# Altium PCB Pallette v2.PcbDoc
Units mm, origin at the board's own origin, x right, y up, seen from the top; angles counter-clockwise.
Board outline 181.32 x 16 mm, 2 copper layers (Top Layer, Bottom Layer); 88 components, 30 nets, 382 pads, 246 vias.
Unrouted connection lines stored in the file: 51.
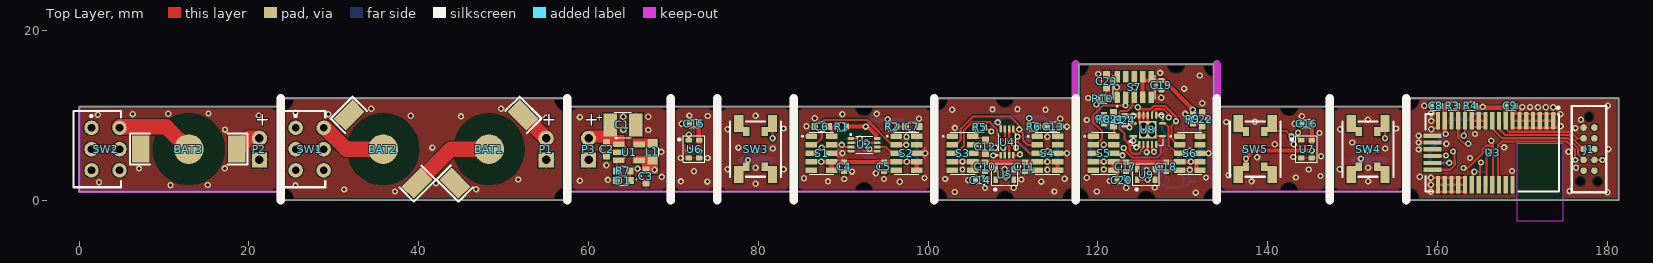
[diagram p0: Top Layer view]
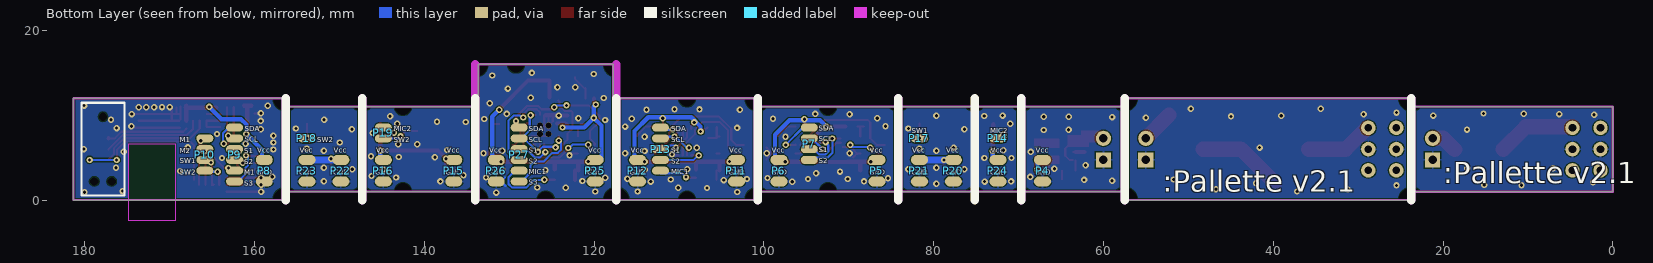
[diagram p1: Bottom Layer view, seen from below]

## Layer stack, top to bottom
Top Solder: solder mask 0.0102, Solder Resist, Dk 3.5
Top Layer: signal copper 0.0356
Dielectric 1: dielectric 0.32, FR-4, Dk 4.8
Bottom Layer: signal copper 0.0356
Bottom Solder: solder mask 0.0102, Solder Resist, Dk 3.5

## Board outline
23.725,0 57.5,0 57.5,1 100.725,1 100.725,0 134.025,0 134.025,1 156.325,1 156.325,0 181.325,0 181.325,12 156.325,12 156.325,11 133.65,11 133.65,16 117.758,16 117.758,12 100.725,12 100.725,11 57.5,11 57.5,12 23.725,12 23.725,11 0,11 0,0.975 23.725,0.975

## Design rules (kind name [scope] priority, off if disabled: settings)
Clearance Clearance_BAT [HasFootprintPad('BAT RETAINER 13', '2')] p1: gap=2.5
Clearance [All] p2: gap=0.125
ComponentClearance [All] p1: gap=0.1 collisioncheckmode=3 verticalgap=0.1 showdistances=FALSE
MinimumSolderMaskSliver [All] p1: minsoldermaskwidth=0.125
PolygonConnect PolygonConnect_Vias [IsVia] p1: connectstyle=Direct reliefconductorwidth=0.254 reliefentries=4 polygonreliefangle="90 Angle" airgapwidth=0.254
PolygonConnect PolygonConnect_BAT [HasFootprint('BAT RETAINER')] p2: connectstyle=Relief reliefconductorwidth=1.8 reliefentries=4 polygonreliefangle="90 Angle" airgapwidth=2.5
PolygonConnect [All] p3: connectstyle=Relief reliefconductorwidth=0.254 reliefentries=4 polygonreliefangle="90 Angle" airgapwidth=0.127
RoutingVias [All] p1: holewidth=0.127 width=0.4 viastyle="Through Hole" minholewidth=0.102 minwidth=0.381 maxholewidth=0.711 maxwidth=1.27
SolderMaskExpansion [All] p1: expansion=0.102
Width [All] p1: maxlimit=2.54 minlimit=0.1 preferedwidth=0.254
28 further rules are at their usual default settings.

## Components (designator, comment, footprint, x,y, rotation, side; value= is the part's Value field where it differs from the comment)
BAT1 "BAT RETAINER 13" "BAT RETAINER 13" 48.275,6 r45 top
BAT2 "BAT RETAINER 13" "BAT RETAINER 13" 35.8,6 r315 top
BAT3 "BAT RETAINER 13" "BAT RETAINER 13" 12.9,6 r0 top (schematic designator BAT1)
C1 "100uF" 1411 64.05,8.85 r0 top (schematic designator C2)
C2 "10uF" 0603 62.125,5.975 r90 top (schematic designator C1)
C3 "22uF" 0603 66.75,2.775 r90 top
C4 "100nF" 0402 90.1,3.9 r90 top
C5 "100nF" 0402 94.8,3.9 r90 top
C6 "22uF" 0603 87.45,8.65 r0 top
C7 "22uF" 0603 98.125,8.65 r180 top
C8 "100nF" 0402 159.825,11.1 r0 top (schematic designator C6)
C9 "100nF" 0402 168.6,11.1 r180 top (schematic designator C5)
C10 "100nF" 0402 106.7,3.9 r90 top (schematic designator C6)
C11 "100nF" 0402 111.4,3.9 r90 top (schematic designator C7)
C12 "22uF" 0603 106.75,6.275 r90 top (schematic designator C18)
C13 "22uF" 0603 114.75,8.65 r180 top (schematic designator C19)
C14 "100nF" 0402 106.15,2.35 r0 top
C15 "100nF" 0402 72.425,9 r180 top
C16 "100nF" 0402 144.575,9 r180 top
C17 "100nF" 0402 123.3,3.9 r90 top
C18 "100nF" 0402 128.05,3.9 r90 top (schematic designator C7)
C19 "100nF" 0402 127.475,13.525 r90 top
C20 "100nF" 0402 122.8,2.35 r0 top (schematic designator C14)
C21 "22uF" 0603 121.85,9.5 r270 top
C22 "22uF" 0603 132.3,9.5 r270 top (schematic designator C19)
C23 "22uF" 0603 121.025,14 r270 top
C24 "100nF" 0402 123.15,9.375 r270 top
D1 "LED Indicator" LED 64.1,2.3 r180 top
J1 "HEADER PROG" TC2050-IDC-NL 177.85,6 r270 top
L1 "10uH" 0805 67.525,5.675 r270 top
P1 "HEADER PW TH" "PORT PW TH 2P" 55,6 r0 top
P2 "HEADER PW TH" "PORT PW TH 2P" 21.225,6 r0 top (schematic designator P1)
P3 "HEADER PW TH" "PORT PW TH 2P" 60,6 r0 top
P4 "HEADER PW SMT" "PORT PW SMT 2P" 67.175,3.46 r180 bottom
P5 "HEADER PW SMT" "PORT PW SMT 2P" 86.675,3.46 r180 bottom
P6 "HEADER PW SMT" "PORT PW SMT 2P" 98.225,3.46 r180 bottom
P7 "CONN 4P" "PORT CONN 4P" 94.65,6.635 r180 bottom
P8 "HEADER PW SMT" "PORT PW SMT 2P" 158.85,3.46 r180 bottom
P9 "CONN 6P" "PORT CONN 6P" 162.35,5.365 r180 bottom
P10 "CONN 4P" "PORT CONN 4P" 165.85,5.365 r180 bottom
P11 "HEADER PW SMT" "PORT PW SMT 2P" 103.225,3.46 r180 bottom
P12 "HEADER PW SMT" "PORT PW SMT 2P" 114.875,3.46 r180 bottom (schematic designator P11)
P13 "CONN 5P" "PORT CONN 5P" 112.175,6 r180 bottom
P14 "CONN 1P" "PORT CONN 1P" 72.425,7.27 r0 bottom
P15 "HEADER PW SMT" "PORT PW SMT 2P" 136.525,3.46 r180 bottom
P16 "HEADER PW SMT" "PORT PW SMT 2P" 144.825,3.46 r180 bottom
P17 "CONN 1P" "PORT CONN 1P" 81.675,7.27 r0 bottom
P18 "CONN 1P" "PORT CONN 1P" 153.825,7.27 r0 bottom (schematic designator P17)
P19 "CONN 2P" "PORT CONN 2P" 144.825,7.905 r180 bottom
P20 "HEADER PW SMT" "PORT PW SMT 2P" 77.675,3.46 r180 bottom
P21 "HEADER PW SMT" "PORT PW SMT 2P" 81.675,3.46 r180 bottom
P22 "HEADER PW SMT" "PORT PW SMT 2P" 149.825,3.46 r180 bottom (schematic designator P20)
P23 "HEADER PW SMT" "PORT PW SMT 2P" 153.825,3.46 r180 bottom (schematic designator P21)
P24 "HEADER PW SMT" "PORT PW SMT 2P" 72.425,3.46 r180 bottom
P25 "HEADER PW SMT" "PORT PW SMT 2P" 119.875,3.46 r180 bottom (schematic designator P11)
P26 "HEADER PW SMT" "PORT PW SMT 2P" 131.525,3.46 r180 bottom (schematic designator P11)
P27 "CONN 6P" "PORT CONN 6P" 128.825,5.365 r180 bottom
R1 "30R" 0402 89.8,8.65 r0 top
R2 "30R" 0402 95.775,8.65 r180 top
R3 "4.7K" 0402 161.775,11.1 r180 top
R4 "4.7K" 0402 163.925,11.1 r0 top
R5 "30R" 0402 106.1,8.55 r0 top (schematic designator R1)
R6 "30R" 0402 112.425,8.65 r180 top (schematic designator R2)
R7 "220R" 0603 64.075,3.425 r180 top
R8 "30R" 0402 120.7,9.5 r90 top
R9 "30R" 0402 131.175,9.5 r90 top (schematic designator R2)
R10 "30R" 0402 120.55,11.925 r180 top
S1 "Si1141-M01" SI1141-M01 87.45,5.5 r0 top
S2 "Si1141-M01" SI1141-M01 97.45,5.5 r0 top
S3 "Si1141-M01" SI1141-M01 104.05,5.5 r0 top (schematic designator S1)
S4 "Si1141-M01" SI1141-M01 114.05,5.5 r0 top (schematic designator S2)
S5 "Si1141-M01" SI1141-M01 120.675,5.5 r0 top
S6 "Si1141-M01" SI1141-M01 130.825,5.5 r0 top
S7 "Si1141-M01" SI1141-M01 124.26,13.3 r90 top
SW1 "SW SPDT SMT" "SW SPDT SMT" 27.15,6 r270 top
SW2 "SW SPDT SMT" "SW SPDT SMT" 3.1,6 r270 top
SW3 "SW PB" "SW PB" 79.675,6 r90 top
SW4 "SW PB" "SW PB" 151.825,6 r90 top
SW5 "SW PB" "SW PB" 138.525,6 r90 top
U1 "XC9265A221MR-G" SOT-25 64.775,5.65 r0 top
U2 "74LVC2G125" VSSOP8 92.45,6.5 r270 top
U3 "BLE113" BLE113-A 166.575,5.575 r270 top
U4 "74LVC2G125" VSSOP8 109.3,6.825 r0 top (schematic designator U2)
U5 "MIC SPW0430HR5HB-B" MIC-4P 109.025,3 r90 top
U6 "MIC SPW0430HR5HB-B" MIC-4P 72.425,6 r0 top
U7 "MIC SPW0430HR5HB-B" MIC-4P 144.575,6 r0 top
U8 "SN74LVC125A" VQFN14 125.875,8.275 r0 top
U9 "MIC SPW0430HR5HB-B" MIC-4P 125.675,3 r90 top (schematic designator U5)

## Footprints (in the part's own frame and the unit in brackets; to place one, negate y for a bottom-side part, rotate by r counter-clockwise, add the part's x,y. Pads: shape width x height; smd on the part's side, far side on the other; paste and mask are expansions set on the pad)
0402 [mm] "Body 1.0x0.5mm, IPC High Density"
  rect 0.6x0.7 smd: 1(-0.55,0) 2(0.55,0)
  silkscreen extent -0.5,-0.5 0.5,0.5, body extent -0.55,-0.3 0.55,0.3, height 1.3
0603 [mm] "Body 1.6x0.8mm, IPC High Density"
  rect 0.8x0.8 smd: 1(-0.8,0) 2(0.8,0)
  silkscreen extent -0.4,-0.55 0.4,0.55, body extent -0.81,-0.46 0.81,0.46, height 1.3
0805 [mm] "Body 2.0x1.25mm, IPC High Density"
  rect 1x1.2 smd: 1(-1,0) 2(1,0)
  silkscreen extent -0.5,-0.75 0.5,0.75, body extent -1.02,-0.65 1.02,0.65, height 1.3
1411 [mm] "Body 3.5x2.8mm, IPC High Density"
  rect 1.6x2.7 smd: 1(-1.5,0) 2(1.5,0)
  silkscreen extent -1,-1.5 1,1.5, body extent -1.52,-1.4 1.52,1.4, height 1.3
"BAT RETAINER 13" [mm] "Body 13.36x12.07mm"
  rect 2.03x3.18 smd: 0(-5.665,0) 1(5.665,0)
  round 3.5 smd paste-5 mask+2.5: 2(0,0)
  silkscreen extent -6.93,-1.83 6.93,1.83, body extent -6.68,-3.15 6.68,4.21, height 5.95
BLE113-A [mm] "Body 15.725x9.15mm"
  rrect50% 2.1x0.5 smd: 1(-3.775,7.075)
  rect 2.1x0.5 smd: 2(-3.775,6.275) 3(-3.775,5.475) 4(-3.775,4.675) 5(-3.775,3.875) 6(-3.775,3.075) 7(-3.775,2.275) 8(-3.775,1.475) 9(-3.775,0.675) 10(-3.775,-0.125) 11(-3.775,-0.925) 12(-3.775,-1.725) 13(-3.775,-2.525) 14(-3.775,-3.325) 15(-3.775,-4.125) 16(-3.775,-4.925) 17(-3.775,-5.725) 18(-3.775,-6.525) 25(3.775,-6.525) 26(3.775,-5.725) 27(3.775,-4.925) 28(3.775,-4.125) 29(3.775,-3.325) 30(3.775,-2.525) 31(3.775,-1.725) 32(3.775,-0.925) 33(3.775,-0.125) 34(3.775,0.675) 35(3.775,1.475) 36(3.775,2.275)
  rect 0.5x2.1 smd: 19(-2,-7.175) 20(-1.2,-7.175) 21(-0.4,-7.175) 22(0.4,-7.175) 23(1.2,-7.175) 24(2,-7.175)
  Keep-Out Layer region: -1.075,2.75 8.025,2.75 8.025,8.25 -1.075,8.25
  silkscreen extent -5.43,-7.98 4.57,7.78, body extent -4.57,-7.97 4.57,7.75, height 1.9
LED [mm] "SMT LED; 2 Flat Leads"
  rect 0.8x0.8 smd: 1(-0.825,0) 2(0.825,0)
  silkscreen extent -0.5,-0.55 0.5,0.55, body extent -0.8,-0.4 0.8,0.4, height 0.65
MIC-4P [mm]
  rect 0.79x0.55 smd: 1(-0.625,1.045) 2(-0.625,-1.045) 3(0.625,-1.045) 4(0.625,1.045)
  silkscreen extent -1.87,-1.55 1.25,1.55, body extent -1.25,-1.55 1.25,1.55, height 1.25
"PORT CONN 1P" [mm] "Body 2x0.95mm"
  oval 2x0.95 smd paste-10: 1(0,0)
"PORT CONN 2P" [mm] "Body 1.2x2mm"
  oval 2x0.95 smd paste-10: 1(0,0.635) 2(0,-0.635)
"PORT CONN 4P" [mm] "Body 1.2x2mm"
  oval 2x0.95 smd paste-10: 1(0,1.905) 2(0,0.635) 3(0,-0.635) 4(0,-1.905)
"PORT CONN 5P" [mm] "Body 1.2x2mm"
  oval 2x0.95 smd paste-10: 1(0,2.54) 2(0,1.27) 3(0,0) 4(0,-1.27) 5(0,-2.54)
"PORT CONN 6P" [mm] "Body 1.2x2mm"
  oval 2x0.95 smd paste-10: 1(0,3.175) 2(0,1.905) 3(0,0.635) 4(0,-0.635) 5(0,-1.905) 6(0,-3.175)
"PORT PW SMT 2P" [mm] "Body 1.2x2mm"
  oval 2x1.2 smd paste-10: 1(0,1.27) 2(0,-1.27)
"PORT PW TH 2P" [mm]
  round 1.8 hole 1: 1(0,1.27)
  rect 1.8x1.8 hole 1: 2(0,-1.27)
SI1141-M01 [mm] "Body 4.9x2.85mm"
  rrect50% 1.35x0.65 smd: 1(-1.2,2)
  rect 1.35x0.65 smd: 2(-1.2,1) 3(-1.2,0) 4(-1.2,-1) 5(-1.2,-2) 6(1.2,-2) 7(1.2,-1) 8(1.2,0) 9(1.2,1) 10(1.2,2)
  silkscreen extent -2.27,-2.48 1.43,2.47, body extent -1.43,-2.45 1.43,2.45, height 1.3
SOT-25 [mm] "Body 2.9x2.8mm"
  rrect50% 1.35x0.65 smd: 1(-1.2,0.95)
  rect 1.35x0.65 smd: 2(-1.2,0) 3(-1.2,-0.95) 4(1.2,-0.95) 5(1.2,0.95)
  silkscreen extent -1.52,1.63 -1.48,1.67, body extent -0.8,-1.45 0.8,1.45, height 1.3
"SW PB" [mm] "Switch"
  rect 2x1.1 smd: 1(-3,2) 1(3,2) 2(-3,-2) 2(3,-2)
  rect 1.05x0.75 smd: 1(-2.075,1.085) 1(2.075,1.085) 2(-2.075,-1.085) 2(2.075,-1.085)
  silkscreen extent -3.25,-3 3.25,3, body extent -3.25,-3 3.25,3, height 2.5
"SW SPDT SMT" [mm] "Switch"
  round 1.7 hole 0.9: 1(-2.5,1.65) 1(-2.5,-1.65) 2(0,1.65) 2(0,-1.65) 3(2.5,1.65) 3(2.5,-1.65)
  silkscreen extent -4.5,-3.77 4.5,1.83, body extent -4.5,-3.77 4.5,1.83, height 3.22
TC2050-IDC-NL [mil] "Programming pads"
  round 0 hole 39 unplated: 0(-150,0) 0(150,-40) 0(150,40)
  round 31 smd paste-50: 1(-100,-25) 2(-50,-25) 3(0,-25) 4(50,-25) 5(100,-25) 6(100,25) 7(50,25) 8(0,25) 9(-50,25) 10(-100,25)
  silkscreen extent -200,-80 200,80
VQFN14 [mm] "Body 3.65x3.65mm"
  rect 2.05x2.05 smd: 0(0,0)
  rect 0.85x0.28 smd mask+0.05: 1(-1.725,-0.75)
  oval 0.28x0.85 smd mask+0.05: 2(-1,-1.725) 3(-0.5,-1.725) 4(0,-1.725) 5(0.5,-1.725) 6(1,-1.725) 9(1,1.725) 10(0.5,1.725) 11(0,1.725) 12(-0.5,1.725) 13(-1,1.725)
  oval 0.85x0.28 smd mask+0.05: 7(1.725,-0.75) 8(1.725,0.75) 14(-1.725,0.75)
  silkscreen extent -2.15,-1.83 1.82,1.83, body extent -1.83,-1.82 1.83,1.83, height 1
VSSOP8 [mm] "Body 2.1x2.4mm"
  oval 0.3x0.8 smd mask+0.05: 1(-0.75,-1.55)
  rect 0.3x0.8 smd mask+0.05: 2(-0.25,-1.55) 3(0.25,-1.55) 4(0.75,-1.55) 5(0.75,1.55) 6(0.25,1.55) 7(-0.25,1.55) 8(-0.75,1.55)
  silkscreen extent -1.25,-1.57 1,1, body extent -1,-1.2 1,1.2, height 1

## Part data
BAT1 BAT2 BAT3: "RETAINER COIN CELL SMD 7.9MM"
C1: library part "Cap Pol 100uF", "CAP TANT POLY 100UF 8V 1411"
C2: library part "CAP 10uF", "CAP CER 10UF ±20% 10V X5R 0603"
C3 C21: library part "CAP 22uF", "CAP CER 22UF 6.3V X5R 0603"
C4 C5 C8 C9 C10 C11 C14 C15 C16 C17 C18 C19 C20 C24: library part "Cap 100nF", "CAP CER 0.1UF 10V X5R 0402"
C6 C7 C12 C13 C22 C23: library part "Cap 22uF", "CAP CER 22UF 6.3V X5R 0603"
D1: "LED Red 630nm 2.2V Diffused White Lens 0603"
J1: "PADS PROGRAMMING"
L1: library part "IND 10uH", "FIXED IND 10UH 500MA 320 MOHM"
P1 P2 P3: "PADS POWER"
P4 P5 P6 P8 P11 P12 P15 P16 P20 P21 P22 P23 P24 P25 P26: "Connection Port"
P7 P10: library part "HEADER CONN 4P", "Connection Port"
P9 P27: library part "HEADER CONN 6P", "Connection Port"
P13: library part "HEADER CONN 5P", "Connection Port"
P14 P17 P18: library part "HEADER CONN 1P", "Connection Port"
P19: library part "HEADER CONN 2P", "Connection Port"
R1 R2 R5 R6 R8 R9 R10: library part "Res 30R", "RES SMD 30 OHM 1% 1/16W 0402"
R3 R4: library part "Res 4.7K", "RES SMD 4.7K OHM 1% 1/16W 0402"
R7: library part "RES 220R", "RES SMD 220 OHM 1% 1/10W 0603"
S1 S2 S3 S4 S5 S6 S7: "SENS IR PROXIMITY AMB LT 10QFN"
SW1 SW2: "SW Single-Pole Double-Throw SMT Right-Angle"
SW3 SW4 SW5: "Switch Button"
U1: library part "VR XC9265A221MR-G", "IC REG BUCK 2.2V 0.2A SYNC SOT25"
U2 U4: library part "BUFF 74LVC2G125", "IC BUS BUFF DVR TRI-ST DL 8VSSOP"
U3: library part "uC BLE113", "MODULE BT 4.0 BLE113 OTA"
U5 U6 U7 U9: "MIC MEMS ANALOG OMNI"
U8: library part "BUFF SN74LVC125A", "IC BUS BUFF TRI-ST QD 14VQFN"

## Free pads (board coordinates)
  round 0 hole 3 unplated: 0(23.725,0) 0(23.725,12) 0(57.5,0) 0(57.5,12) 0(69.675,0) 0(69.675,12) 0(75.175,12) 0(75.175,0) 0(84.175,12) 0(84.175,0) 0(100.725,0) 0(100.725,12) 0(117.375,0) 0(117.375,16) 0(134.025,0) 0(134.025,16) 0(147.325,0) 0(147.325,12) 0(156.325,0) 0(156.325,12)
  round 0 hole 2 unplated: 0(92.45,1) 0(92.45,11) 0(109.05,0) 0(109.05,12) 0(125.7,0) 0(129.2,16) 0(142.525,1) 0(142.525,11)

## Via types
v1: diameter 0.75, hole 0.38, Top Layer to Bottom Layer, tented both sides, 242 vias
v2: diameter 0.7, hole 0.7, Top Layer to Bottom Layer, tented bottom, 4 vias

## Nets (pads, with @x,y where several pads share a name; then routed paths per layer and width w, separated by ;. In a path a pad name is that pad's centre, name@x,y a point inside that pad or via, vN(x,y) a via of type N, cw(c..) or ccw(c..) an arc to the next point about the centre after c; other vN are vias at no path point)
+2V2: C3.2 C4.2 C5.2 C8.2 C9.2 C10.2 C11.2 C14.1 C15.1 C16.1 C17.2 C18.2 C19.2 C20.1 C24.2 J1.2 L1.2 P4.1 P5.1 P6.1 P8.1 P11.1 P12.1 P15.1 P16.1 P20.1 P21.1 P22.1 P23.1 P24.1 P25.1 P26.1 R1.2 R2.2 R3.2 R4.2 R5.2 R6.2 R8.2 R9.2 R10.2 S1.4 S1.6 S1.7 S2.4 S2.6 S2.7 S3.4 S3.6 S3.7 S4.4 S4.6 S4.7 S5.4 S5.6 S5.7 S6.4 S6.6 S6.7 S7.4 S7.6 S7.7 SW3.1 SW4.1 SW5.1 U1.4 U2.8 U3.8 U3.17 U4.8 U5.4 U6.4 U7.4 U8.14 U9.4 | length 163
  Top Layer w0.254: SW3.1@78.825,4.125 v1@78.825,4.725 ; C14.1 S3.6@105.6,3.45 ; R5.2 106.875,8.325 v1@107.45,8.325 ; v1(108.2,9.15) 108.55,8.8 U4.8 ; R6.2@111.9,8.65 v1@111.9,9.5 ; SW4.1@150.975,4.125 v1(150.975,4.875) ; U3.8@168.05,8.4 168.402,8.048 175.675,8.048 ; 175.685,8.048 176.463,7.27 J1.2
  Top Layer w0.5: U6.4@72.975,7.045 C15.1@72.975,8.925 ; v1(73.05,5.775) U6.4 ; S1.4 S1.7 ; S1.6 S1.7 ; R1.2@90.375,8.65 v1(92.65,8.65) ; v1@92.85,8.65 93.85,7.65 93.85,7.4 ; C5.2@94.875,4.475 90.125,4.475 90.1,4.5 S1.7 ; C5.2@94.95,4.5 S2.4 S2.7 S2.6 ; R2.2 v1@95.225,9.475 ; S3.4 S3.7@105.225,4.5 ; S3.6@105.225,3.5 S3.7@105.225,4.5 ; C10.2@106.7,4.5 S3.7 S3.7@105.225,4.5 ; C10.2@106.725,4.5 S4.4 S4.7 S4.6 ; U5.4 107.98,4.495 ; S5.4@119.5,4.5 S5.7 S5.6 ; v1@120,11.45 R10.2 ; S5.7@121.9,4.5 C17.2@123.35,4.5 ; C20.1 S5.6@122.25,3.45 ; C24.2 123.35,9.025 U8.14@124.375,9.025 ; C17.2@123.385,4.49 123.375,4.5 127.101,4.5 S6.7@131.9,4.5 ; U9.4 124.63,4.495 ; S7.4 125.26,14.075 C19.2 127.775,14.075 v1@131.15,10.7 ; S6.6@131.6,3.5 S6.7@131.6,4.5 ; SW5.1@137.45,3.935 v1(137.45,4.875) 138.4,5.825 v1(145.2,5.825) ; v1@145.2,5.875 U7.4 C16.1@145.2,8.925 ; C8.2 R3.2 ; v1@160.85,7.875 U3.17@160.85,9.25 ; U3.17 160.85,11.05 ; R4.2@164.475,10.875 C9.2@168.05,10.875 ; U3.8 C9.2@168.05,10.875 ; C9.2 C9.2@168.05,10.875 ; C9.2@168.1,10.875 C9.2@168.05,10.875 ; J1.2@177.18,7.27 J1.2
  Bottom Layer w0.254: P20.1 P20.1@78.005,4.73 ; P22.1 P22.1@150.155,4.73
  Bottom Layer w0.5: v1(67.775,3.575) P4.1@67.775,4.75 ; P24.1@73.05,4.725 v1(73.05,5.775) ; v1(92.65,8.65) 93.4,9.4 96.973,9.4 98.675,7.698 P6.1@98.675,4.325 ; v1@107.45,8.225 107.45,8.65 108.55,9.75 113.625,9.75 115.25,8.125 P12.1@115.25,4.55 ; P25.1@119.125,4.73 119.125,8.77 v1(120.031,9.675) ; v1(119.8,11.25) 120.031,11.019 v1(120.031,9.675) ; v1(123.725,8.55) 121.156,8.55 v1(120.031,9.675) ; v1(131.175,10.65) 132,9.825 P26.1@132,4.7 ; P16.1@145.2,5.105 v1@145.2,5.875 ; P8.1@159.125,4.725 159.125,5.925 v1(160.975,7.775) ; v1@160.95,7.825 160.95,8.892 161.583,9.525 163.875,9.525 v1(165.325,10.975)
  Bottom Layer w0.8: P20.1@78.005,4.73 P21.1 ; P22.1@150.155,4.73 P23.1
  other v1: 87.4,4.5 97.475,4.5 114.05,4.5 130.95,4.5 104.05,4.525 120.675,4.525 78.775,4.725 107.45,8.075 95.225,9.525 111.9,9.625
GND: C1.2 C2.1 C3.1 C4.1 C5.1 C6.1 C7.1 C8.1 C9.1 C10.1 C11.1 C12.1 C13.1 C14.2 C15.2 C16.2 C17.1 C18.1 C19.1 C20.2 C21.1 C22.1 C23.1 C24.1 D1.2 J1.1 P1.2 P2.2 P3.2 P4.2 P5.2 P6.2 P8.2 P11.2 P12.2 P15.2 P16.2 P20.2 P21.2 P22.2 P23.2 P24.2 P25.2 P26.2 S1.8 S2.8 S3.8 S4.8 S5.8 S6.8 S7.8 SW1.2 SW2.2 U1.2 U2.4 U3.1 U3.2 U3.3 U3.4 U3.5 U3.6 U3.7 U3.11 U3.12 U3.13 U3.18 U3.19 U3.20 U3.21 U3.25 U3.26 U3.27 U3.28 U3.29 U3.36 U4.4 U5.2 U5.3 U6.2 U6.3 U7.2 U7.3 U8.0 U8.7 U8.11 U8.12 U8.13 U9.2 U9.3 | length 57.3
  Top Layer w0.254: U1.2 U1.2 ; S1.8 89.006,5.5 89.504,5.002 ; S1.8@88.981,5.45 89.479,5.948 ; S2.8@98.981,5.475 99.666,6.159 ; S2.8@99.006,5.5 99.703,4.803 ; S3.8@105.225,5.5 S3.8@105.581,5.5 ; U4.4 v1@110.675,5.275 ; S5.8 122.65,5.5 v1(122.89,5.26) ; v1(124.15,9.95) v1@124.2,10 ; U8.13@124.875,9.925 124.875,9.275 v2(125.375,8.775) ; U8.0@125.375,8.25 U8.12@125.375,9.975 ; U8.0@125.625,7.525 U8.7@127.35,7.525 ; U8.0 U8.11 ; v1@159.225,8.525 U3.18@160,8.525 ; v1@159.225,10.175 U3.18@160,10.175 ; v1@159.45,0.975 U3.29@163.275,0.975 ; 159.65,2.625 U3.29@163.275,2.625 ; U3.25 U3.26 U3.29 ; U3.13@163.977,10.15 U3.11@165.625,10.15 ; U3.13@164.002,8.625 U3.11@165.65,8.625 ; U3.13 U3.12 U3.11 U3.11@165.65,8.6 ; U3.7@168.725,9.475 168.725,11.021 ; U3.7@168.752,10.15 v1@174.35,10.15 ; U3.7@168.777,8.525 v1@174.25,8.525 ; U3.7 U3.6 U3.5 U3.4 U3.3 U3.2 U3.1 ; 169.2,10.15 C9.1@169.2,10.898 ; U3.6@169.75,9.427 v1@169.75,10.973
  Top Layer w0.45: 62.225,5.648 U1.2@63.3,5.648
  Top Layer w0.5: C24.1@123.175,9.95 v1(124.15,9.95) ; v1@124.2,10 U8.13 U8.12 U8.11@125.75,10 ; 131.175,5.5 S6.8 v1(133.025,5.5)
  Bottom Layer w0.254: 130.429,1.657 P26.2@130.912,2.14 ; 130.479,2.673 P26.2@130.962,2.19 ; P26.2@131.062,2.19 P26.2
  other v1: 131.525,0.875 180.025,0.925 103.125,0.95 159.225,0.975 37.2,1 114.875,1 119.85,1 175.55,1.05 31.2,1.25 46.75,1.275 106.7,1.425 110.075,1.45 123.35,1.45 126.7,1.475 25.475,1.725 10.75,1.75 15.15,1.775 159.225,1.8 79.675,1.925 42.025,1.975 2.325,2.1 96.65,2.15 74,2.175 113.325,2.175 70.875,2.2 88.2,2.2 138.1,2.2 151.825,2.225 121.375,2.25 58.975,2.275 104.725,2.35 62.275,2.375 51.725,2.425 110.975,2.425 90.125,2.475 94.8,2.475 102,2.475 116.075,2.5 85.375,2.575 99.575,2.6 118.675,2.625 159.225,2.625 132.725,2.65 143.325,2.65 68.625,2.725 157.9,2.75 146.225,2.825 135.375,2.925 93.85,3.15 91.025,3.35 72.425,3.4 168.775,3.425 125.725,3.525 130.825,3.55 114.05,3.575 104.05,3.6 120.675,3.6 144.825,3.6 76.375,3.625 82.975,3.625 109.025,3.625 148.5,3.625 65.775,3.7 7.05,3.725 17.15,3.725 79.675,3.8 151.825,3.8 176.325,3.8 62.1,4.1 70.825,4.95 74.025,4.95 163.825,4.95 138.75,5.05 143,5.075 146.275,5.15 110.825,5.375 89.9,5.5 99.65,5.5 116.35,5.5 68.55,5.675 175.425,5.7 114.05,5.775 79.675,5.8 130.825,5.8 151.825,5.8 71.8,5.875 137.325,5.9 157.775,5.95 180.125,6 81.7,6.075 153.85,6.075 107.9,6.15 41.6,6.175 77.65,6.175 167.85,6.2 140.825,6.575 143.075,6.575 161.05,6.625 149.95,6.775 157.775,6.775 97.45,7.45 114.05,7.45 157.775,7.575 164.425,7.775 146.1,7.9 67.025,8.25 64.1,8.275 17.175,8.3 76.375,8.35 148.525,8.35 159.275,8.35 82.975,8.425 155.125,8.425 176.25,8.475 103.15,8.5 116.35,8.65 85.675,8.7 174.5,8.7 70.975,9 143.175,9 135.125,9.2 138.5,9.225 159.275,9.325 118.7,9.425 151.8,9.45 176.9,9.45 132.95,9.55 98.925,9.575 115.55,9.575 86.65,9.625 121.85,9.625 55,9.7 58.975,9.775 64.075,9.8 67.025,9.825 44.975,9.85 144.025,9.875 74.05,9.9 39.05,9.925 79.675,9.925 21.15,9.95 71.875,9.95 2.2,10.05 29.35,10.1 89.9,10.1 6.3,10.125 174.475,10.125 93.95,10.15 130.3,10.15 10.5,10.175 15.225,10.2 159.25,10.225 25.475,10.3 102.825,10.625 113.825,10.625 107.575,10.675 110.525,10.7 34.4,10.75 49.7,10.75 171.825,10.925 172.75,10.925 173.65,10.925 169.975,10.95 170.9,10.95 158.45,11.1 180.075,11.125 132.3,11.4 118.85,12.025 127.45,12.05 130.15,13.125 124.325,13.275 122.225,13.3 132,14.675 120.05,14.85 127.325,14.975
  other v2: 125.375,7.775 126.375,7.775 126.375,8.775
MIC1: P9.5 P10.1 P13.5 P27.5 U3.33 U5.1 U9.1 | length 22.8
  Top Layer w0.254: U5.1@108.005,2.625 v1@109.1,2.625 ; U9.1 U9.1@124.63,2.424 ; U9.1@124.655,2.4 v1(125.85,2.4) ; v1(163.075,3.775) 163.578,3.775 165.298,5.495 165.298,6.01 165.69,6.402 166.55,6.402 ; U3.33@166.55,1.8 166.56,1.81 166.56,6.99 v1@166.55,7
  Bottom Layer w0.254: v1(109.175,2.7) 109.635,3.16 P13.5@112.2,3.16 ; v1@125.85,2.375 127.08,2.375 127.992,1.463 129.651,1.463 130.077,1.889 130.077,2.698 129.315,3.46 P27.5
  other v1: 166.325,6.975
MIC2: P10.2 P14.1 P19.1 U3.32 U6.1 U7.1 | length 7.2
  Top Layer w0.254: U6.1 v1(71.8,7.7) ; v1(143.575,7.925) 143.575,7.42 U7.1 ; U3.32@165.775,1.8 v1@165.775,5.8
  Bottom Layer w0.254: v1(143.575,7.925) 144.19,8.54 P19.1
  other v1: 165.933,5.725
NetBAT1_2: BAT1.2 BAT2.1 | length 10.1
  Top Layer w1.8: BAT2.1 43.812,6 BAT1.2
NetBAT2_2: BAT2.2 SW1.1 | length 7.9
  Top Layer w1.8: SW1.1@28.975,8.48 31.455,6 BAT2.2
NetBAT3_2: BAT3.2 SW2.1 | length 9.2
  Top Layer w1.8: SW2.1@4.75,8.63 10.253,8.63 BAT3.2@12.892,5.992
NetC6_2: C6.2 R1.1 S1.10 | length 1.9
  Top Layer w0.254: C6.2@88.225,8.65 R1.1@88.975,8.65 ; S1.10 C6.2@88.65,8.625
NetC7_2: C7.2 R2.1 S2.10 | length 2.6
  Top Layer w0.254: R2.1@96.275,8.65 97.375,8.65 C7.2@97.375,8.425 ; C7.2@97.475,8.475 S2.10@98.4,7.55
NetC12_2: C12.2 R5.1 S3.10 | length 2.5
  Top Layer w0.254: S3.10 105.55,7.5 R5.1@105.55,8.625 ; S3.10@105.55,7.325 C12.2@106.6,7.325
NetC13_2: C13.2 R6.1 S4.10 | length 2.4
  Top Layer w0.254: R6.1@112.85,8.65 C13.2 ; C13.2@114.075,8.475 S4.10@115,7.55
NetC21_2: C21.2 R8.1 S5.10 | length 2.1
  Top Layer w0.254: R8.1 C21.2@121.6,8.95 ; S5.10 C21.2@121.875,8.675
NetC22_2: C22.2 R9.1 S6.10 | length 2.3
  Top Layer w0.254: R9.1 C22.2@132.05,8.95 ; S6.10 C22.2@132.025,8.95
NetC23_2: C23.2 R10.1 S7.10 | length 3
  Top Layer w0.254: R10.1@121.025,12 C23.2 ; C23.2@121.025,13.05 S7.10@122.26,14.285 ; S7.10@122.26,14.435 S7.10
NetD1_1: D1.1 R7.1 | length 1.1
  Top Layer w0.254: D1.1@64.875,2.425 R7.1@64.875,3.5
NetL1_1: L1.1 U1.5
PROG_DC: J1.3 U3.9 | length 11.9
  Top Layer w0.254: U3.9 167.25,8.375 167.965,7.66 175.525,7.66 ; 175.537,7.66 J1.3@177.206,5.991 ; J1.3@177.172,6 J1.3
PROG_DD: J1.4 U3.10 | length 13.6
  Top Layer w0.254: U3.10 166.45,8.425 167.594,7.281 175.375,7.281 ; 175.38,7.281 176.569,6.092 176.569,5.376 J1.4
R\E\S\E\T\: J1.7 U3.34 | length 19.2
  Top Layer w0.254: U3.34@167.125,2.35 167.125,6.463 167.564,6.902 175.223,6.902 176.19,5.935 176.19,4.91 v1@176.425,4.675 ; J1.7 v1@179.42,4.73
  Bottom Layer w0.254: v1(176.25,4.725) v1(179.425,4.725)
S1_EN: P7.3 P9.3 P13.3 P27.3 U2.7 U3.24 U4.7 U8.4 | length 19.5
  Top Layer w0.254: v1@92.575,6.6 92.725,6.75 U2.7 ; U4.7 109.05,7.364 v1@110.291,6.123 ; v1@125.725,5.65 125.875,5.8 U8.4@125.875,6.575 ; U3.24 161.487,3.575 162.027,4.115 162.027,4.635 162.025,4.637 v1@162.025,5.725
  Bottom Layer w0.254: v1@92.575,6.6 92.425,6.45 92.425,5.701 92.747,5.379 93.504,5.379 P7.3@94.025,5.9 ; v1@110.347,6.429 111.171,6.429 P13.3@111.763,5.838 ; v1@125.725,5.575 v1@125.725,5.65 ; v1@125.725,5.72 v1@125.725,5.65 ; P27.3@129.2,5.65 128.85,6 127.975,6 126.967,4.992 126.383,4.992 v1@125.725,5.65 ; P9.3@161.875,5.825 161.975,5.925 P9.3@161.975,6 ; P9.3@161.875,6 P9.3@161.975,6 ; P9.3@161.975,6.075 P9.3@161.975,6 ; P9.3@162.325,6 P9.3@161.975,6
  other v1: 125.731,5.65 161.825,5.725 110.347,6.179 92.725,6.825
S1_SCL: S1.3 S3.3 S5.3 U2.3 U4.3 U8.6 | length 27.2
  Top Layer w0.254: S1.3 86.775,5.5 v1@87.45,6.175 ; v1@89.8,6.25 U2.3@90.75,6.25 ; S3.3 103.35,5.5 104.229,6.379 104.229,8.235 105.169,9.175 107.25,9.175 108.125,8.3 108.125,7.753 109.55,6.328 U4.3 ; S5.3@119.896,5.554 v1@120.771,6.429 ; v1@122.856,6.194 122.856,6.183 124.014,5.025 125.52,5.025 ; 125.521,5.023 126.041,5.023 ; 126.043,5.025 126.95,5.025 127.4,5.475 127.4,6.3 127.137,6.563 U8.6@126.888,6.563
  Bottom Layer w0.254: v1@87.45,6.25 v1@89.85,6.25 ; v1@120.675,6.725 120.875,6.525 122.55,6.525 122.95,6.125 v1(123.056,6.125)
  other v1: 87.475,6.175 89.825,6.5 120.7,6.525
S2_EN: P7.4 P9.4 P13.4 P27.4 U2.1 U3.23 U4.1 U8.10 | length 24
  Top Layer w0.254: U2.1@91,7.25 v1@91.9,7.25 ; v1@107.9,5.275 U4.1 ; U8.10@126.375,10.025 126.375,10.339 126.738,10.702 127.748,10.702 128.35,10.1 v1@128.35,9.55 ; U3.23 v1@161.175,4.375
  Bottom Layer w0.254: v1@91.9,7.25 91.9,5.6 92.5,5 93.875,5 P7.4@94.45,4.425 ; v1@107.675,5.525 107.675,5.35 108.325,4.7 111.98,4.7 P13.4@112.2,4.48 ; v1@128.35,9.55 128.75,9.95 129.475,9.95 130.1,9.325 130.1,5.63 P27.4@129.2,4.73 ; v1@161.175,4.375 P9.4@161.53,4.73
  other v1: 161.386,4.375 107.675,5.25 91.95,7.25 128.35,9.725
S2_SCL: S2.3 S4.3 S6.3 U2.6 U4.6 U8.8 | length 12.4
  Top Layer w0.254: U2.6 95,6.25 95.75,5.5 S2.3 ; U4.6@109.549,8.351 109.549,7.41 110.135,6.823 110.627,6.823 111.95,5.5 S4.3 ; U8.8@127.6,9.05 127.9,9.05 128.3,8.65 128.3,6.475 128.297,6.472 129.269,5.5 S6.3
S3_EN: P9.6 P27.6 U3.22 U8.1 | length 13.2
  Top Layer w0.254: U8.1 124.156,7.519 v1(124.156,7) ; U3.22@159.425,5.2 v1@160.925,5.2
  Bottom Layer w0.254: v1@124.181,7.075 123.898,6.792 123.898,5.927 124.272,5.553 124.922,5.553 125.95,4.525 127.05,4.525 127.472,4.103 127.472,3.25 127.482,3.25 P27.6@128.303,2.428 ; v1@160.75,5.225 160.75,4.099 161.075,3.774 161.075,3.05 P9.6@161.935,2.19
  other v1: 161,5.25
S3_SCL: S7.3 U8.3 | length 9.8
  Top Layer w0.254: 123.15,7.086 123.75,6.486 123.75,5.825 124.15,5.425 124.792,5.425 125.104,5.737 125.104,5.929 U8.3@125.375,6.2 ; 123.15,7.136 123.15,7.8 122.525,8.425 122.525,10.325 122.7,10.5 123.495,10.5 124.075,11.08 124.075,11.559 S7.3@124.26,11.744
SCL: P7.2 P9.2 P13.2 P27.2 R4.1 U2.2 U2.5 U3.14 U4.2 U4.5 U8.2 U8.5 U8.9 | length 24.5
  Top Layer w0.254: U2.2 91.453,6.75 92.453,5.75 U2.5@93.9,5.75 ; v1@108.68,6.2 109.05,5.831 U4.2 ; U4.5@110.05,8.081 v1@110.755,7.375 ; U4.5@110.075,8.206 U4.5@110.075,8.3 ; v1@126.375,5.937 U8.5@126.375,6.575 ; U8.9 v1(127.475,10) ; v1(163.1,7.575) 163.25,7.725 U3.14 R4.1@163.25,10.975
  Bottom Layer w0.254: v1(93.1,6.013) P7.2@94.357,7.27 ; v1@108.805,6.15 109.1,6.15 110.4,7.45 P13.2@111.5,7.45 ; P13.2@111.554,7.02 P13.2@112.2,7.02 ; v1@124.464,6.283 125.987,6.283 125.993,6.277 126.035,6.277 v1@126.402,5.91 ; v1@126.653,5.653 P27.2@128.525,7.525 ; v1@127.573,10 127.573,8.239 128.542,7.27 P27.2@129.2,7.27
  other v1: 126.606,5.675 108.83,6.15 124.531,6.2 110.53,7.45
SDA: P7.1 P9.1 P13.1 P27.1 R3.1 S1.2 S2.2 S3.2 S4.2 S5.2 S6.2 S7.2 U3.15 | length 61.4
  Top Layer w0.254: S1.2@85.725,6.5 S1.2 86.7,6.5 87.475,7.275 87.475,9.15 87.75,9.425 92.8,9.425 S2.2@95.725,6.5 ; S2.2@96.275,6.525 S2.2 v1@97.428,6.5 ; S3.2@102.325,6.5 S3.2 S3.2@103.3,6.5 ; S3.2@103.275,6.5 103.85,7.075 103.85,8.392 105.283,9.825 109.694,9.825 110.7,8.819 110.7,8.325 111.175,7.85 111.175,7.025 111.7,6.5 S4.2@112.589,6.5 ; S5.2@119.925,6.5 119.925,6.675 120.5,7.25 120.5,8.1 119.398,9.202 119.398,9.938 120.585,11.125 v1@123.275,11.125 ; v1(124.7,10.925) 124.925,10.7 126.2,10.7 126.581,11.081 127.905,11.081 129.2,9.786 v1(129.2,9.3) ; v1@129.3,9.375 128.679,8.754 128.679,7.185 129.364,6.5 S6.2 ; R3.1@162.45,10.975 U3.15 162.45,7.338 163.163,6.625 v1@163.6,6.625
  Bottom Layer w0.254: P7.1@95.175,8.6 95.329,8.6 v1(97.429,6.5) ; v1@110.7,8.575 111.025,8.25 P13.1@112.135,8.25 ; v1(123.25,11.15) 124.475,11.15 v1(124.7,10.925) ; P9.1 P9.1@163.206,8.54 ; P9.1@163.206,8.365 163.727,7.844 163.727,6.727 v1(163.625,6.625)
  other v1: 110.725,8.325
SW1: P10.3 P17.1 SW3.2 U3.31 | length 4.6
  Top Layer w0.254: v1(81.675,7.275) SW3.2@81.675,9 ; U3.31@164.802,1.848 U3.31 ; U3.31@165.002,1.748 v1@165.002,4.575
  other v1: 165.125,4.425
SW2: P10.4 P18.1 P19.2 SW4.2 SW5.2 U3.30 | length 9
  Top Layer w0.254: SW5.2@140.825,8.125 142.175,8.125 v1(142.8,7.5) ; v1(153.825,7.275) SW4.2@153.825,9 ; U3.30@164.15,1.8 v1@164.15,3.4
  Bottom Layer w0.254: v1(142.8,7.5) 143.03,7.27 P19.2 ; v1(164.35,3.325) P10.4@165.715,3.325
VBAT: BAT1.1 BAT3.1 C1.1 C2.2 P1.1 P2.1 P3.1 R7.2 U1.1 U1.3 | length 11.4
  Top Layer w0.254: R7.2@63.275,3.5 U1.3@63.275,4.675 ; U1.3 63.981,4.7 64.502,5.221 64.502,6.079 63.981,6.6 U1.1
  Top Layer w1.8: BAT3.1@18.62,5.945 19.95,7.275 P2.1@21.23,7.275 ; P2.1 P2.1@21.233,7.278 ; BAT1.1 55.008,7.278 P1.1
pads on no net: BAT1.0 BAT2.0 BAT3.0 J1.0 J1.5 J1.6 J1.8 J1.9 J1.10 S1.1 S1.5 S1.9 S2.1 S2.5 S2.9 S3.1 S3.5 S3.9 S4.1 S4.5 S4.9 S5.1 S5.5 S5.9 S6.1 S6.5 S6.9 S7.1 S7.5 S7.9 SW1.3 SW2.3 U3.16 U3.35

## Polygon pours and split planes (outlines as drawn)
GND on Bottom Layer "Bottom Layer-GND" (solid, remove dead copper, pour order 22): -5.175,18.25 193.786,18.25 193.786,-7.231 -5.175,-7.231
GND on Top Layer "Top Layer-No Net" (solid, remove dead copper, pour order 26): -5.183,22.179 -5.183,-3.747 194.343,-3.747 194.343,22.179 123.996,22.179

## Keep-outs
Keep-Out Layer:
  lines w0.254: 23.725,0 57.5,0 ; 23.725,0.975 0,0.975 0,11 23.725,11 23.725,12 57.5,12 57.5,11 100.725,11 100.725,12 117.375,12 ; 57.5,1 100.725,1 ; 100.725,0 134.025,0 ; 117.375,16 134.025,16 ; 134.025,1 156.325,1 ; 134.025,11 156.325,11 156.325,12 181.325,12 181.325,0 156.325,0
  lines w1: 23.725,0 23.725,12 ; 57.5,0 57.5,12 ; 69.675,0 69.675,12 ; 84.175,0 84.175,12 ; 100.725,0 100.725,12 ; 117.375,0 117.375,16 ; 134.025,0 134.025,16 ; 147.325,0 147.325,12 ; 156.325,0 156.325,12

## Other copper
Top Layer:
  rectangle net VBAT: 61.725,6.25 64.25,7.675
  rectangle net VBAT: 61.725,7.325 63.35,7.6
  rectangle net NetL1_1: 65.2,6.125 68.175,7.225
  rectangle net +2V2: 65.2,4.225 68.175,5.225
  rectangle net VBAT: 60.025,6.75 62.625,8.175
  rectangle net +2V2: 66.275,3.075 68.175,4.425

## Silkscreen, mask and mechanical layers (free items; w line width, h text height)
Top Overlay:
  lines w1: 23.725,0 23.725,12 ; 57.5,0 57.5,12 ; 69.675,0 69.675,12 ; 75.175,0 75.175,12 ; 84.175,0 84.175,12 ; 100.725,0 100.725,12 ; 117.375,0 117.375,12 ; 134.025,0 134.025,12 ; 147.325,0 147.325,12 ; 156.325,0 156.325,12
Bottom Overlay:
  lines w1: 23.725,0 23.725,12 ; 57.5,0 57.5,12 ; 69.675,0 69.675,12 ; 75.175,0 75.175,12 ; 84.175,0 84.175,12 ; 100.725,0 100.725,12 ; 117.375,0 117.375,12 ; 134.025,0 134.025,12 ; 147.325,0 147.325,12 ; 156.325,0 156.325,12
  text "SDA" at 93.525,8.16 h0.6
  text "MIC2" at 143.625,8.095 h0.6
  text "SDA" at 161.125,8.1 h0.6
  text "SDA" at 110.925,8.075 h0.6
  text "SDA" at 127.675,8.085 h0.6
  text "MIC2" at 73.35,7.875 h0.6
  text "SW1" at 82.6,7.875 h0.6
  text "SCL" at 93.525,6.91 h0.6
  text "SCL" at 161.125,6.85 h0.6
  text "SCL" at 110.925,6.825 h0.6
  text "SCL" at 127.675,6.835 h0.6
  text "SW2" at 143.625,6.825 h0.6
  text "SW2" at 152.625,6.83 h0.6
  text "M1" at 168.8,6.8 h0.6
  text "S1" at 93.525,5.635 h0.6
  text "Vcc" at 68,5.575 h0.6
  text "Vcc" at 73.25,5.575 h0.6
  text "Vcc" at 78.5,5.575 h0.6
  text "Vcc" at 82.5,5.575 h0.6
  text "Vcc" at 87.5,5.575 h0.6
  text "Vcc" at 99.05,5.575 h0.6
  text "Vcc" at 104.05,5.575 h0.6
  text "S1" at 110.925,5.55 h0.6
  text "Vcc" at 115.7,5.575 h0.6
  text "Vcc" at 120.7,5.575 h0.6
  text "S1" at 127.675,5.56 h0.6
  text "Vcc" at 132.35,5.575 h0.6
  text "Vcc" at 137.35,5.575 h0.6
  text "Vcc" at 145.65,5.575 h0.6
  text "Vcc" at 150.65,5.575 h0.6
  text "Vcc" at 154.65,5.575 h0.6
  text "Vcc" at 159.675,5.575 h0.6
  text "S1" at 161.183,5.525 h0.6
  text "M2" at 168.8,5.525 h0.6
  text "S2" at 93.525,4.335 h0.6
  text "SW1" at 168.8,4.325 h0.6
  text "S2" at 127.675,4.26 h0.6
  text "S2" at 110.925,4.25 h0.6
  text "S2" at 161.183,4.225 h0.6
  text "MIC1" at 127.675,3.05 h0.6
  text "MIC1" at 110.925,3.025 h0.6
  text "SW2" at 168.8,3 h0.6
  text "GND" at 68.1,2.975 h0.6
  text "GND" at 73.35,2.975 h0.6
  text "GND" at 78.6,2.975 h0.6
  text "GND" at 82.6,2.975 h0.6
  text "GND" at 87.6,2.975 h0.6
  text "GND" at 99.15,2.975 h0.6
  text "GND" at 104.15,2.975 h0.6
  text "GND" at 115.8,2.975 h0.6
  text "GND" at 120.8,2.975 h0.6
  text "GND" at 132.45,2.975 h0.6
  text "GND" at 137.45,2.975 h0.6
  text "GND" at 145.75,2.975 h0.6
  text "GND" at 150.75,2.975 h0.6
  text "GND" at 154.75,2.975 h0.6
  text "GND" at 159.775,2.975 h0.6
  text "M1" at 161.183,2.975 h0.6
  text ":Pallette v2.1" at 20,2 h2.5
  text "S3" at 127.675,1.775 h0.6
  text "S3" at 161.183,1.705 h0.6
  text ":Pallette v2.1" at 53,1 h2.5
Board Outline:
  lines w0.254: 133.65,11 156.325,11 156.325,12 181.325,12 181.325,0 156.325,0 156.325,1 134.025,1 134.025,0 100.725,0 100.725,1 57.5,1 57.5,0 23.725,0 23.725,0.975 0,0.975 0,11 23.725,11 23.725,12 57.5,12 57.5,11 100.725,11 100.725,12 117.758,12 117.758,16 133.65,16 133.65,11 ; 133.65,11 133.65,11
PCB Notes:
  text "V-scores on Mechanical 30 Layer" at 23.225,-6.3 h1.52
Drill Drawing:
  text ".Legend" at 0.525,28.65 h1.52
V-Score:
  lines w0.5: 23.725,0 23.725,12 ; 57.5,0 57.5,12 ; 69.675,0 69.675,12 ; 75.175,0 75.175,12 ; 84.175,0 84.175,12 ; 100.725,0 100.725,12 ; 117.375,0 117.375,12 ; 134.025,0 134.025,12 ; 147.325,0 147.325,12 ; 156.325,0 156.325,12

## Text inside footprints (layer, text, board x,y; h text height)
C1: Top Overlay "+" at 60.85,9.35 h0.76
D1: Top Overlay "+" at 65.95,2.55 h0.5 r180
P1: Top Overlay "+" at 54.5,8.75 h1.52
P2: Top Overlay "+" at 20.725,8.75 h1.52
P3: Top Overlay "+" at 59.5,8.75 h1.52